# Allegro board OSCILLATOR.brd
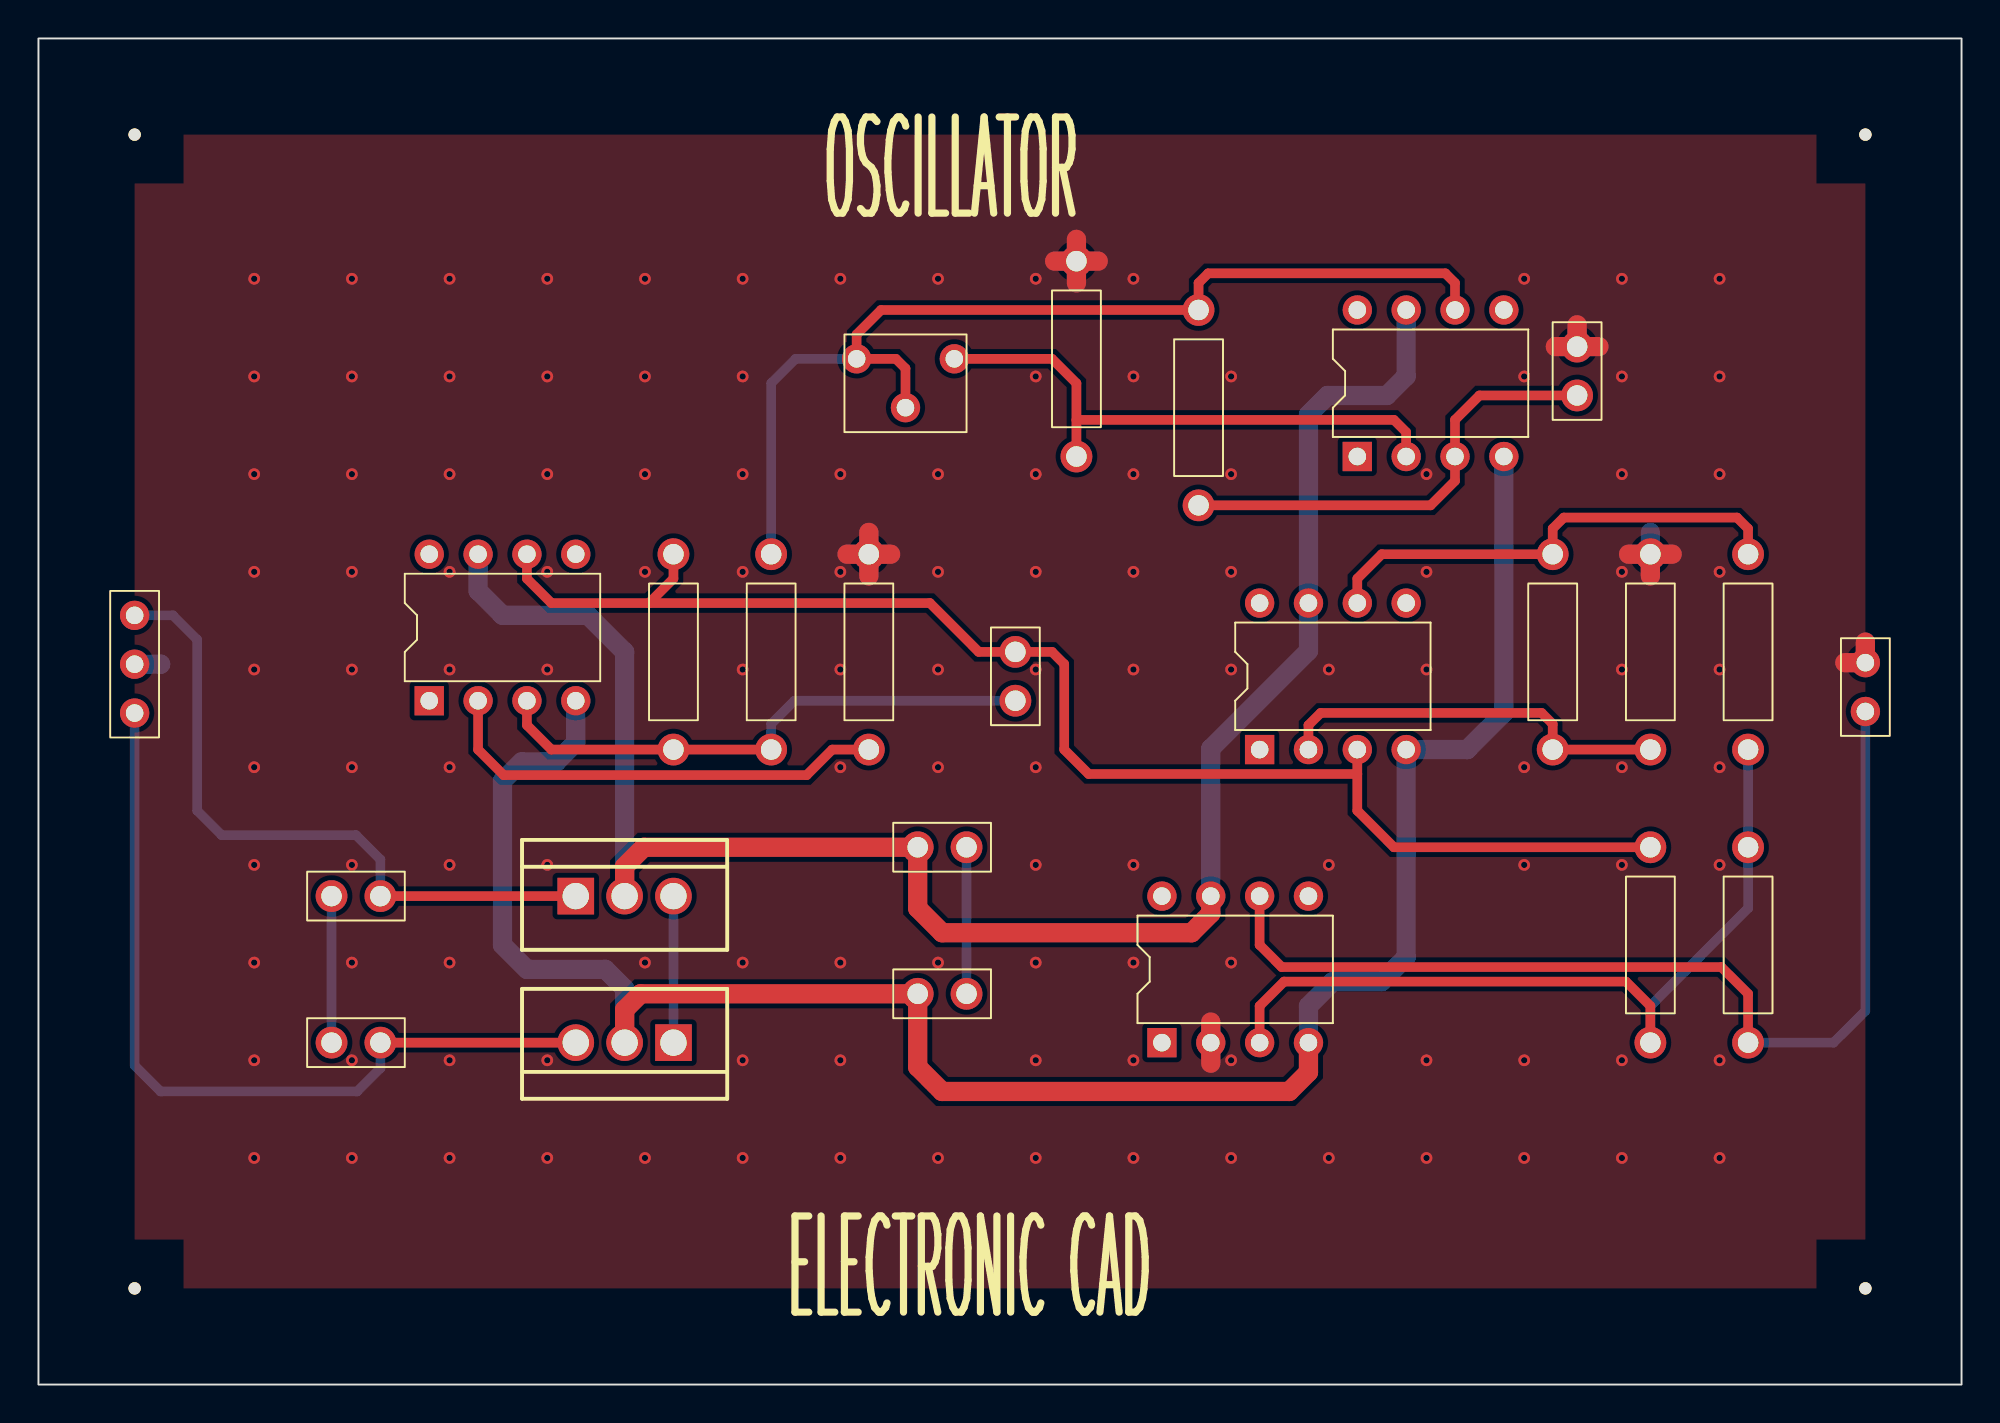
[diagram p0: board, top side]
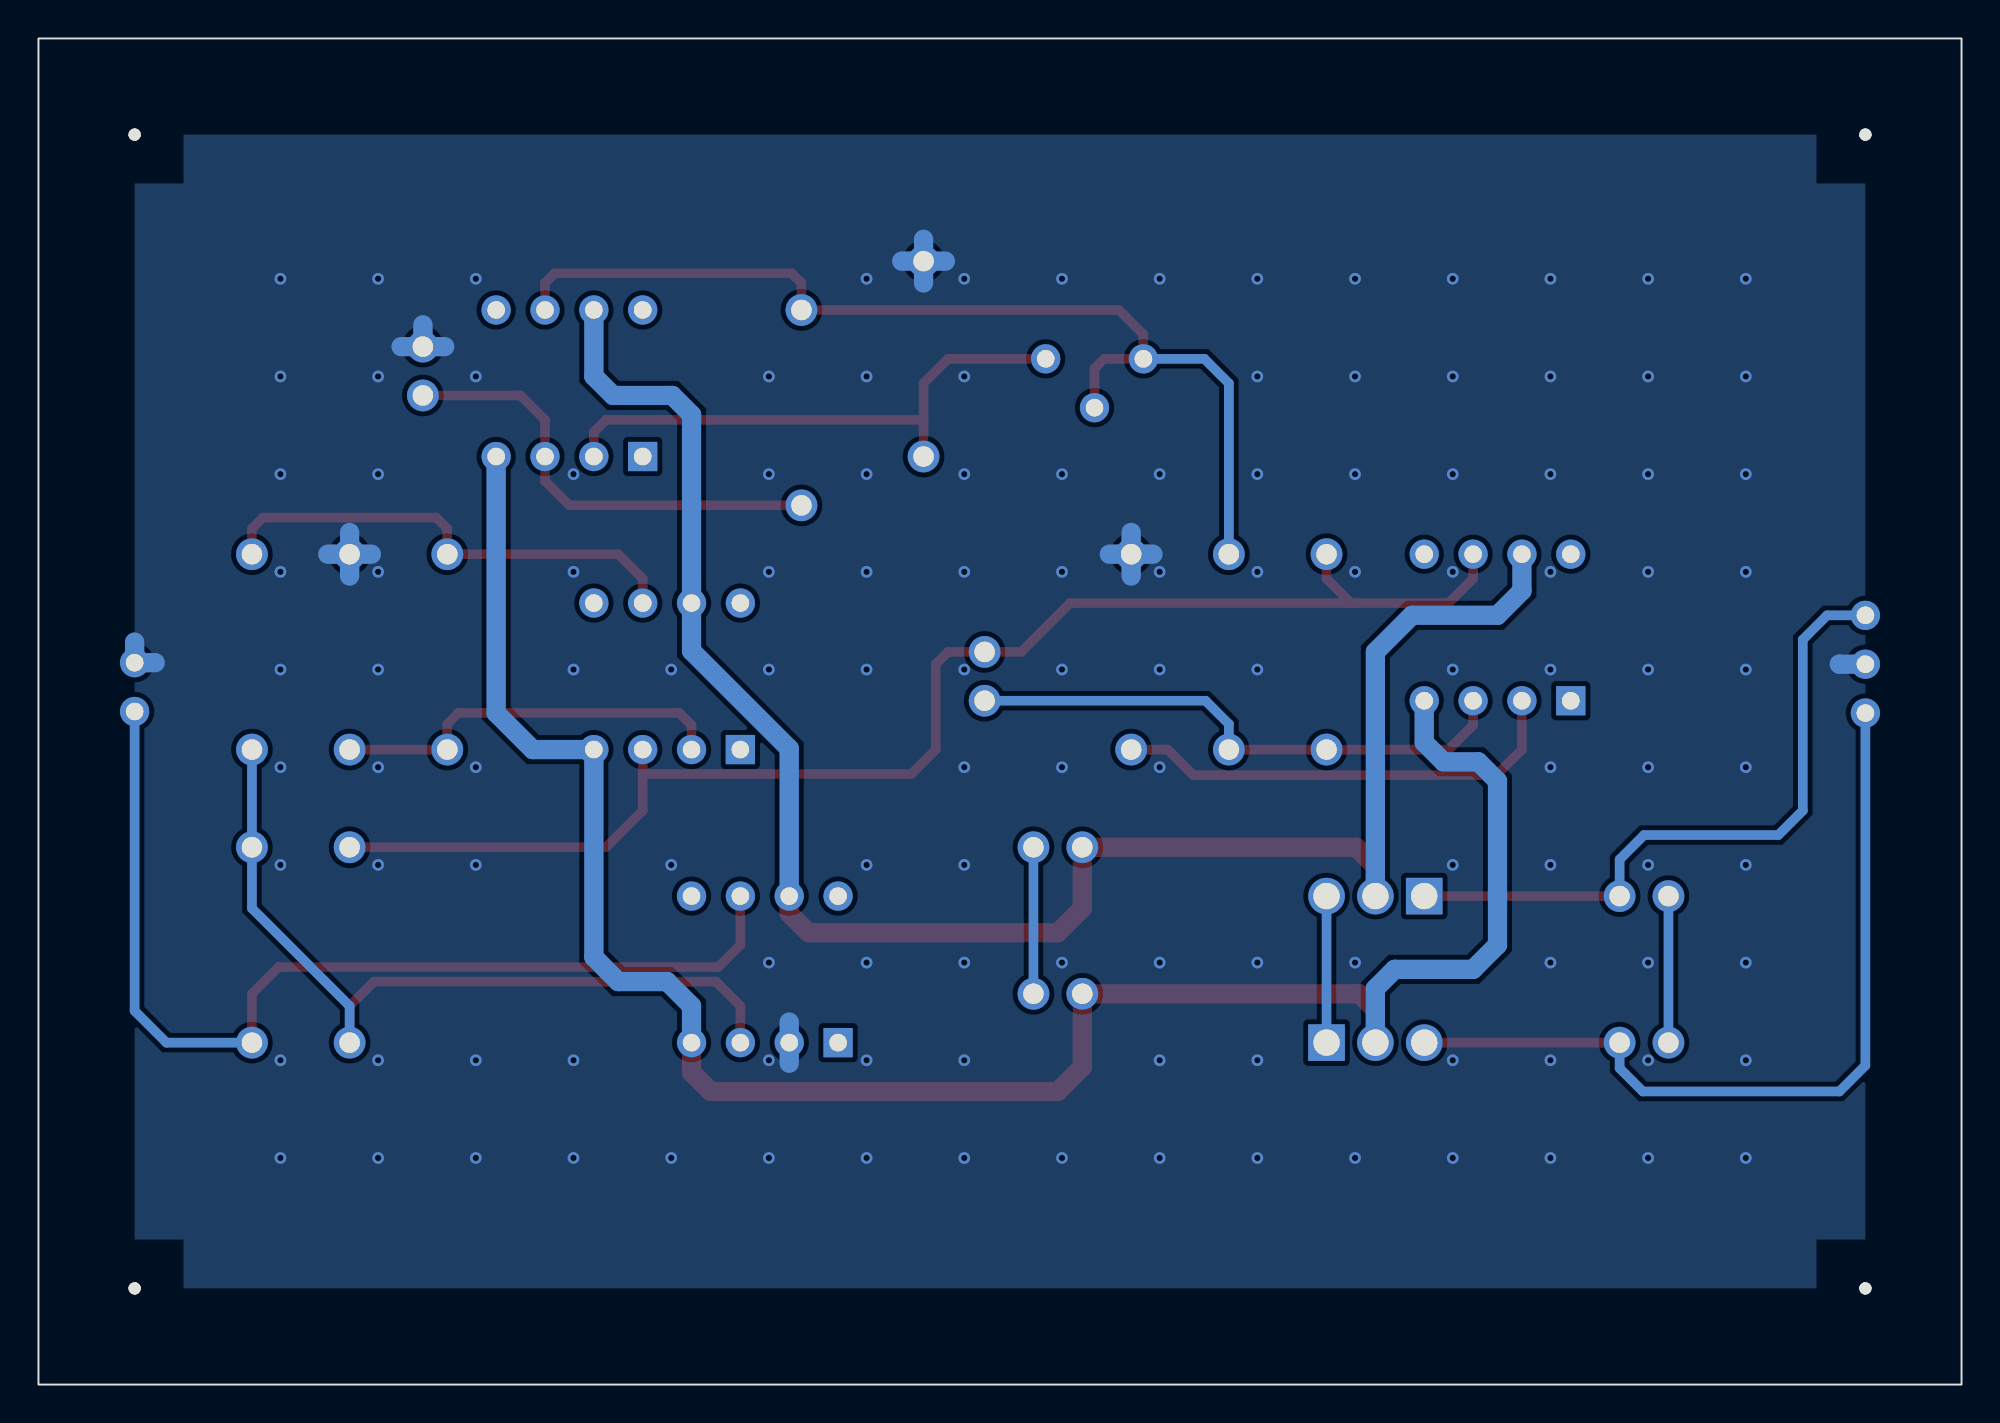
[diagram p1: board, bottom side, seen from below]

Outline 100 x 70 mm; copper layers: TOP, BOTTOM. Coordinates in mm from the lower left corner of the outline.
Outline path: rectangle 0,0 100,70

## Design rules (mm)
constraint set DEFAULT: min track width 0.5
nets with their own width: min track width 1; nets +VCC -VCC GND

## Placement (name value [footprint] x y rotation side)
C1  0.001uF  [CAPCK05]  50.8 35.56 0 top
C2  270pF  [CAPCK05]  80.01 51.44 0 top
C3  0.01uF  [CAPCK05]  17.78 25.4 90 top
C4  0.01uF  [CAPCK05]  45.72 27.94 270 top
C5  0.01uF  [CAPCK05]  15.24 17.78 270 top
C6  0.01uF  [CAPCK05]  48.26 20.32 90 top
J1  CON3  [JUMPER3]  5 40 270 top
J2  CON2  [JUMPER2]  95 35 90 top
NOREF  -  []  0 70 0 top
NOREF#2  -  [unnamed#2]  5 65 0 top
NOREF#3  -  [unnamed#2]  5 5 0 top
NOREF#4  -  [unnamed#2]  95 65 0 top
NOREF#5  -  [unnamed#2]  95 5 0 top
NOREF#6  -  []  100 0 90 top
R1  10K  [RES400]  60.33 45.72 0 top
R2  100K  [RES400]  33.02 33.02 0 top
R3  10K  [RES400]  83.82 27.94 180 top
R4  10K  [RES400]  88.9 27.94 180 top
R5  62K  [RES400]  38.1 43.18 180 top
R6  10K  [RES400]  43.18 33.02 0 top
R7  10K  [RES400]  88.9 43.18 180 top
R8  10K  [RES400]  53.98 48.26 0 top
R9  10K  [RES400]  78.74 33.02 0 top
R10  10K  [RES400]  83.82 33.02 0 top
U1  LF351  [DIP8_3]  68.58 48.26 90 top
U2  LF351  [DIP8_3]  20.32 35.56 90 top
U3  LF351  [DIP8_3]  63.5 33.02 90 top
U4  LF351  [DIP8_3]  58.42 17.78 90 top
U5  LM7812C  [TO220AB]  27.94 25.4 0 top
U6  LM7912C  [TO220AB]  33.02 17.78 180 top
VR1  1M  [RESADJ]  42.55 53.34 90 top

## Library data of the parts
C1-C6 = CAP NP: Tolerance: ***; User Part Number: ***
J1 = CON3: User Part Number: ***
J2 = CON2: User Part Number: ***
R1-R10 = R: Tolerance: ***; User Part Number: ***
U1-U4 = LF351: Tolerance: ***; User Part Number: ***
U5 = LM7812C_2
U6 = LM7912C_2
VR1 = POT: Tolerance: ***; User Part Number: ***

## Footprints (pads in the part's own frame, mm; a bottom-side part is the same pattern mirrored in y, then rotated)
CAPCK05
  round 1.651 hole 1.067: 1(0,0) 2(0,2.54)
DIP8_3
  rect 1.524x1.524 hole 0.914: 1(0,0)
  round 1.524 hole 0.914: 2(0,-2.54) 3(0,-5.08) 4(0,-7.62) 5(7.62,-7.62) 6(7.62,-5.08) 7(7.62,-2.54) 8(7.62,0)
JUMPER2
  round 1.524 hole 0.914: 1(0,0) 2(2.54,0)
JUMPER3
  round 1.524 hole 0.914: 1(0,0) 2(2.54,0) 3(5.08,0)
RES400
  round 1.651 hole 1.067: 1(0,0) 2(0,10.16)
RESADJ
  round 1.524 hole 0.914: 1(0,0) 2(-2.54,-2.54) 3(0,-5.08)
TO220AB
  rect 1.905x1.905 hole 1.372: 1(0,0)
  round 1.905 hole 1.372: 2(2.54,0) 3(5.08,0)
unnamed#2
  round 0.635 hole 3.175 unplated: (0,0)

## Nets
+VCC: C4.1 U1.7 U2.7 U3.7 U4.7 U5.2(OUT)
-VCC: C6.2 U1.4(V-) U2.4(V-) U3.4(V-) U4.4(V-) U6.2(OUT)
GND: C2.2 J1.2 J2.2 R6.2 R8.2 R10.2 U4.2
OUT: J2.1 R4.2 U4.6
SIG: C1.2 R2.2 R3.1 U2.6 U3.3
N00774: C3.1 J1.1 U5.1
N00798: C3.2 C5.1
N00802: C5.2 J1.3 U6.3
N00826: U5.3 U6.1
N00842: C4.2 C6.1
N00870: C2.1 R1.1 U1.3
N00877: R1.2 R5.1 U1.6 VR1.1 VR1.2(WIPER)
N00908: R8.1 U1.2 VR1.3
N00970: C1.1 R2.1 R5.2 U2.3
N01024: R6.1 U2.2
N01035: R9.1 R10.1 U3.2
N01070: R3.2 R4.1 R7.2 U4.3
N01090: R7.1 R9.2 U3.6

Pads without a net: U1 1 5 8; U2 1 5 8; U3 1 5 8; U4 1 5 8

## Via types
v1: diameter 0.61, hole 0.33, TOP to BOTTOM, 125 vias

## Routing (per net, layer and track width the routed paths; a pad name or vN(x,y) marks a point on that pad's centre or on a via; arc(x,y) is an arc through that point)
+VCC: length 97.5
  TOP w1: U4.7 60.96,24.5 59.96,23.5 46.99,23.5 45.72,24.77 C4.1 31.48,27.94 30.48,26.94 U5.2
  BOTTOM w1: U5.2 30.48,38.1 28.57,40.01 24.13,40.01 22.86,41.27 U2.7 ; U4.7 60.96,33.07 66.04,38.15 U3.7 66.04,50.44 67.04,51.44 70.12,51.44 71.12,52.44 U1.7
-VCC: length 107.4
  TOP w1: U4.4 66.04,16.24 65.04,15.24 46.99,15.24 45.72,16.51 C6.2 31.31,20.32 30.48,19.49 U6.2
  BOTTOM w1: U6.2 30.48,20.59 29.48,21.59 25.4,21.59 24.13,22.86 24.13,31.39 25.13,32.38 26.94,32.38 27.94,33.38 U2.4 ; U4.4 66.04,19.68 67.31,20.95 69.85,20.95 71.12,22.23 U3.4 74.3,33.02 76.2,34.92 U1.4
GND: length 42.8
  TOP w1: 82.69,43.18 R10.2 ; R10.2 83.82,42.05 ; R10.2 84.95,43.18 ; 93.93,37.54 J2.2 95,38.61 ; C2.2 81.14,53.98 ; C2.2 78.88,53.98 ; C2.2 80.01,55.11 ; 52.84,58.42 R8.2 ; R8.2 53.98,57.29 ; R8.2 55.11,58.42 ; R8.2 53.98,59.55 ; 43.18,42.05 R6.2 ; R6.2 42.05,43.18 ; R6.2 43.18,44.31 ; R6.2 44.31,43.18 ; 60.96,16.71 U4.2 60.96,18.85
  BOTTOM w1: R10.2 83.82,44.31 ; R10.2 82.69,43.18 ; R10.2 84.95,43.18 ; R10.2 83.82,42.05 ; 78.88,53.98 C2.2 ; C2.2 81.14,53.98 ; C2.2 80.01,55.11 ; 42.05,43.18 R6.2 ; R6.2 43.18,42.05 ; R6.2 43.18,44.31 ; R6.2 44.31,43.18 ; J1.2 6.35,37.46 6.35,37.47 ; 95,38.61 J2.2 93.93,37.54 ; R8.2 53.98,59.55 ; R8.2 53.98,57.29 ; R8.2 52.84,58.42 ; R8.2 55.11,58.42 ; 60.96,18.85 U4.2 60.96,16.71
  vias: v1(11.22,57.5) v1(11.22,52.42) v1(11.22,47.34) v1(11.22,42.26) v1(11.22,37.18) v1(11.22,32.1) v1(11.22,27.02) v1(11.22,21.94) v1(11.22,16.86) v1(11.22,11.78) v1(16.3,57.5) v1(16.3,52.42) v1(16.3,47.34) v1(16.3,42.26) v1(16.3,37.18) v1(16.3,32.1) v1(16.3,27.02) v1(16.3,21.94) v1(16.3,16.86) v1(16.3,11.78) v1(21.38,57.5) v1(21.38,52.42) v1(21.38,47.34) v1(21.38,42.26) v1(21.38,37.18) v1(21.38,32.1) v1(21.38,27.02) v1(21.38,21.94) v1(21.38,16.86) v1(21.38,11.78) v1(26.46,57.5) v1(26.46,52.42) v1(26.46,47.34) v1(26.46,42.26) v1(26.46,37.18) v1(26.46,27.02) v1(26.46,16.86) v1(26.46,11.78) v1(31.54,57.5) v1(31.54,52.42) v1(31.54,47.34) v1(31.54,42.26) v1(31.54,21.94) v1(31.54,11.78) v1(36.62,57.5) v1(36.62,52.42) v1(36.62,47.34) v1(36.62,42.26) v1(36.62,37.18) v1(36.62,21.94) v1(36.62,16.86) v1(36.62,11.78) v1(41.7,57.5) v1(41.7,47.34) v1(41.7,42.26) v1(41.7,37.18) v1(41.7,32.1) v1(41.7,21.94) v1(41.7,16.86) v1(41.7,11.78) v1(46.78,57.5) v1(46.78,47.34) v1(46.78,42.26) v1(46.78,37.18) v1(46.78,32.1) v1(46.78,21.94) v1(46.78,11.78) v1(51.86,57.5) v1(51.86,52.42) v1(51.86,47.34) v1(51.86,42.26) v1(51.86,37.18) v1(51.86,32.1) v1(51.86,27.02) v1(51.86,21.94) v1(51.86,16.86) v1(51.86,11.78) v1(56.94,57.5) v1(56.94,52.42) v1(56.94,47.34) v1(56.94,42.26) v1(56.94,37.18) v1(56.94,27.02) v1(56.94,21.94) v1(56.94,16.86) v1(56.94,11.78) v1(62.02,52.42) v1(62.02,47.34) v1(62.02,42.26) v1(62.02,37.18) v1(62.02,21.94) v1(62.02,16.86) v1(62.02,11.78) v1(67.1,37.18) v1(67.1,27.02) v1(67.1,11.78) v1(72.18,47.34) v1(72.18,42.26) v1(72.18,37.18) v1(72.18,16.86) v1(72.18,11.78) v1(77.26,57.5) v1(77.26,52.42) v1(77.26,32.1) v1(77.26,27.02) v1(77.26,16.86) v1(77.26,11.78) v1(82.34,57.5) v1(82.34,52.42) v1(82.34,47.34) v1(82.34,42.26) v1(82.34,37.18) v1(82.34,32.1) v1(82.34,27.02) v1(82.34,16.86) v1(82.34,11.78) v1(87.42,57.5) v1(87.42,52.42) v1(87.42,47.34) v1(87.42,42.26) v1(87.42,37.18) v1(87.42,32.1) v1(87.42,27.02) v1(87.42,16.86) v1(87.42,11.78)
OUT: length 53.9
  TOP w0.5: U4.6 63.5,22.86 64.65,21.71 87.51,21.71 88.9,20.32 R4.2
  BOTTOM w0.5: R4.2 93.35,17.78 95,19.43 J2.1
SIG: length 73.5
  TOP w0.5: 68.58,31.75 68.58,29.84 70.48,27.94 R3.1 ; 68.58,31.75 U3.3 ; 68.58,31.75 54.61,31.75 53.34,33.02 53.34,37.47 52.7,38.1 C1.2 48.89,38.1 46.35,40.64 31.75,40.64 ; 31.75,40.64 33.02,41.91 R2.2 ; 31.75,40.64 26.67,40.64 25.4,41.91 U2.6
N00774: length 35.3
  TOP w0.5: C3.1 U5.1
  BOTTOM w0.5: J1.1 6.99,40 8.26,38.73 8.26,29.84 9.53,28.57 16.51,28.57 17.78,27.3 C3.1
N00798: length 7.6
  BOTTOM w0.5: C5.1 C3.2
N00802: length 43.7
  TOP w0.5: C5.2 U6.3
  BOTTOM w0.5: J1.3 5,16.59 6.35,15.24 16.57,15.24 17.78,16.45 C5.2
N00826: length 7.6
  BOTTOM w0.5: U6.1 U5.3
N00842: length 7.6
  BOTTOM w0.5: C6.1 C4.2
N00870: length 23.9
  TOP w0.5: C2.1 74.93,51.44 73.66,50.16 U1.3 73.66,46.99 72.39,45.72 R1.1
N00877: length 54.8
  TOP w0.5: U1.6 73.66,57.28 73.16,57.78 60.83,57.78 60.33,57.28 R1.2 43.81,55.88 42.55,54.61 VR1.1 44.59,53.34 45.09,52.84 VR1.2
  BOTTOM w0.5: VR1.1 39.37,53.34 38.1,52.07 R5.1
N00908: length 29.4
  TOP w0.5: VR1.3 52.7,53.34 53.98,52.07 53.98,50.16 ; U1.2 71.12,49.53 70.48,50.16 53.98,50.16 ; 53.98,50.16 R8.1
N00970: length 29
  TOP w0.5: R5.2 R2.1 26.67,33.02 25.4,34.29 U2.3
  BOTTOM w0.5: C1.1 39.31,35.56 38.1,34.35 R5.2
N01024: length 24
  TOP w0.5: R6.1 41.28,33.02 39.95,31.69 24.19,31.69 22.86,33.02 U2.2
N01035: length 20.9
  TOP w0.5: U3.2 66.04,34.29 66.67,34.92 78.17,34.92 78.74,34.35 R9.1 R10.1
N01070: length 42.5
  TOP w0.5: R3.2 83.82,19.68 82.55,20.95 64.77,20.95 63.5,19.68 U4.3
  BOTTOM w0.5: R7.2 R4.1 88.9,24.77 83.82,19.68 R3.2
N01090: length 25.3
  TOP w0.5: R7.1 88.9,44.51 88.33,45.09 79.31,45.09 78.74,44.51 R9.2 69.85,43.18 68.58,41.91 U3.6

## Copper pours and planes (outline as drawn; the poured copper is in the pictures)
GND on TOP: 95,5 5,5 5,65 95,65 ; 1 cut-out
GND on BOTTOM: 95,5 5,5 5,65 95,65

## Text on the board
Ref Des/Silkscreen Top: ELECTRONIC CAD | OSCILLATOR
DIMENSION: FIGURE | FINISHED_SIZE | 0.914 | 1.067 | 1.372 | 3.175 | DRILL CHART: TOP to BOTTOM | ALL UNITS ARE IN MILLIMETERS | PLATED | NON-PLATED | QTY | 40 | 32 | 6 | 4
